# Altium PCB PCB3.PCBDOC
Units mm, origin at the board's own origin, x right, y up, seen from the top; angles counter-clockwise.
Board outline 263.14 x 221.49 mm, 2 copper layers (Top Layer, Bottom Layer); 30 components, 101 nets, 458 pads, 51 vias.
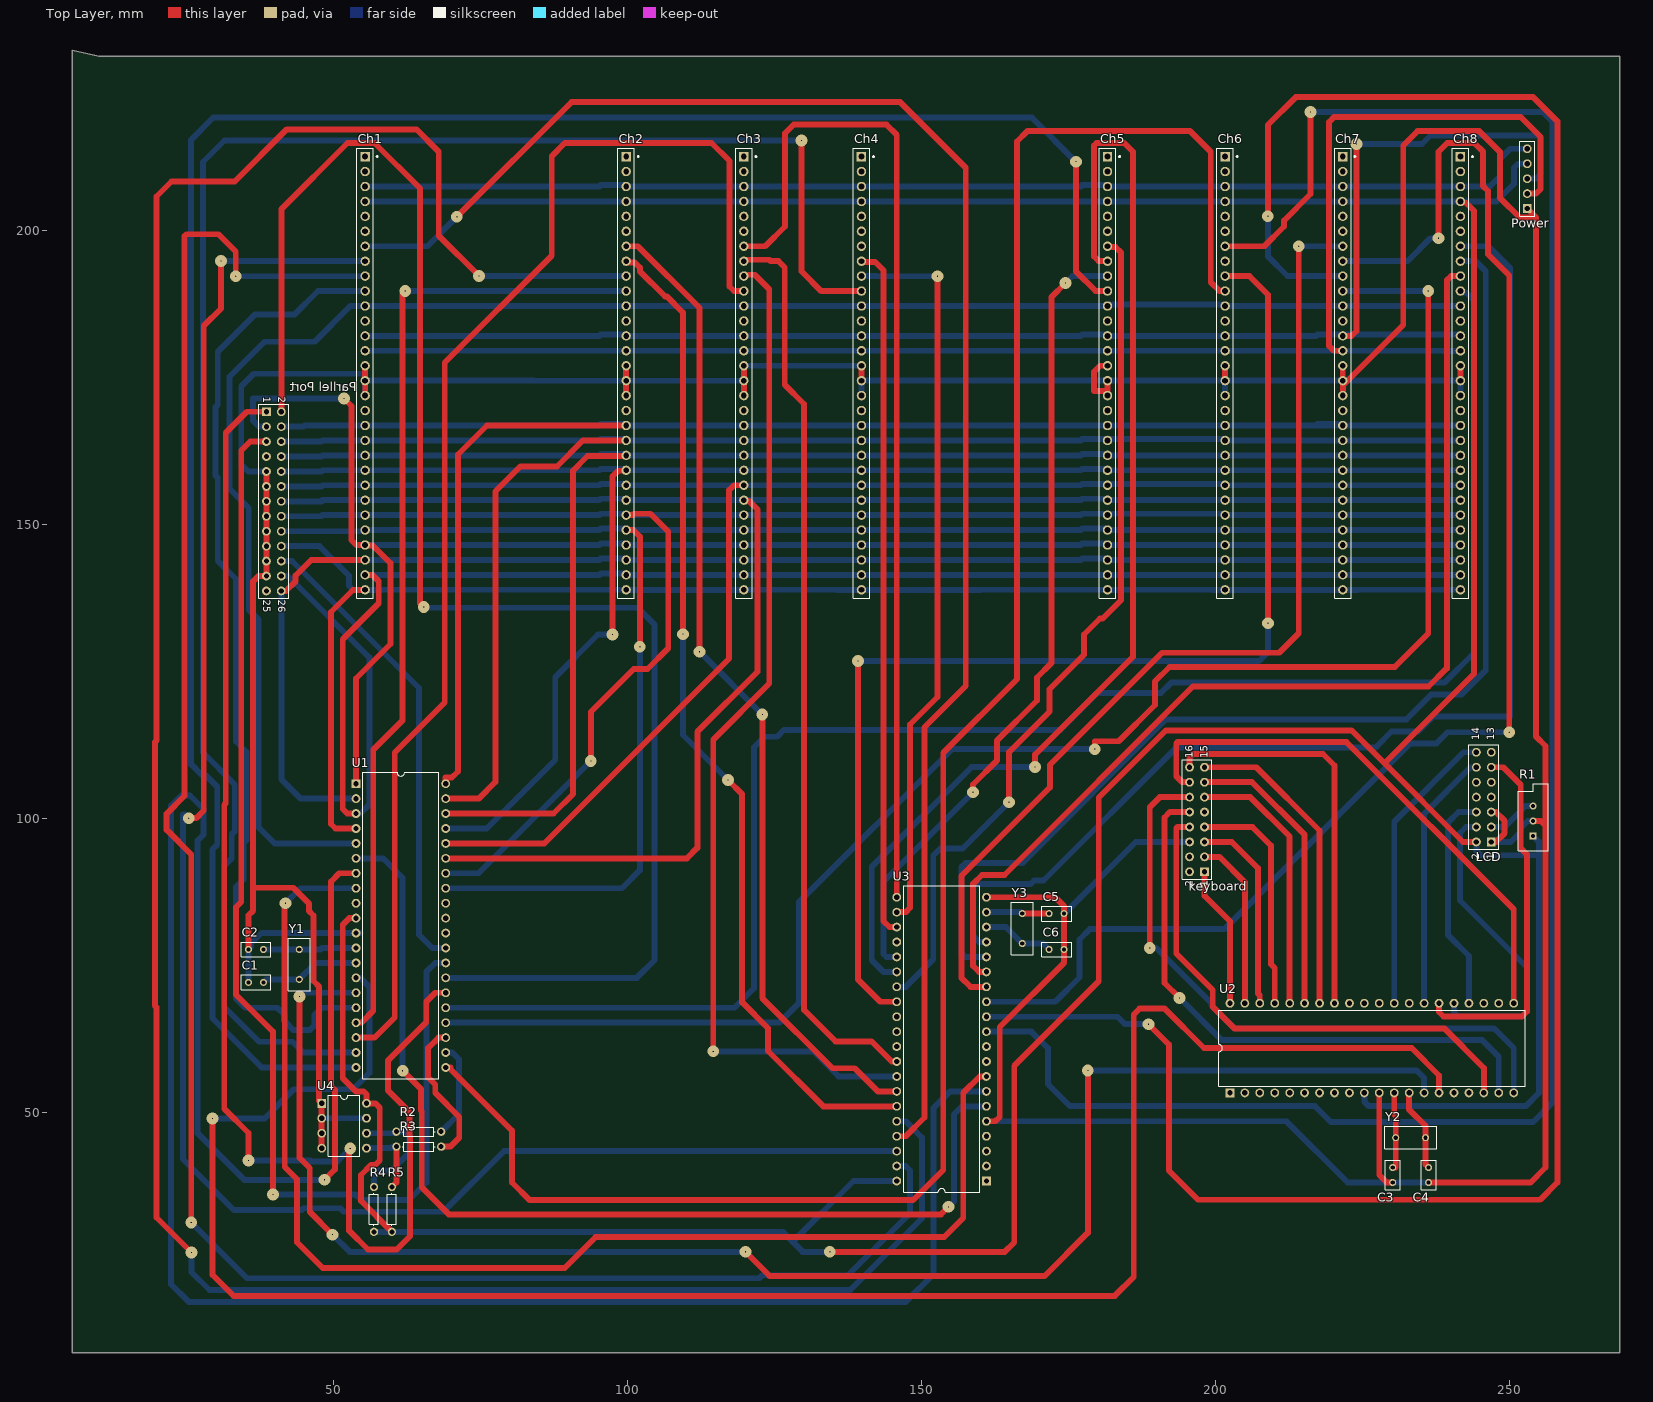
[diagram p0: Top Layer view]
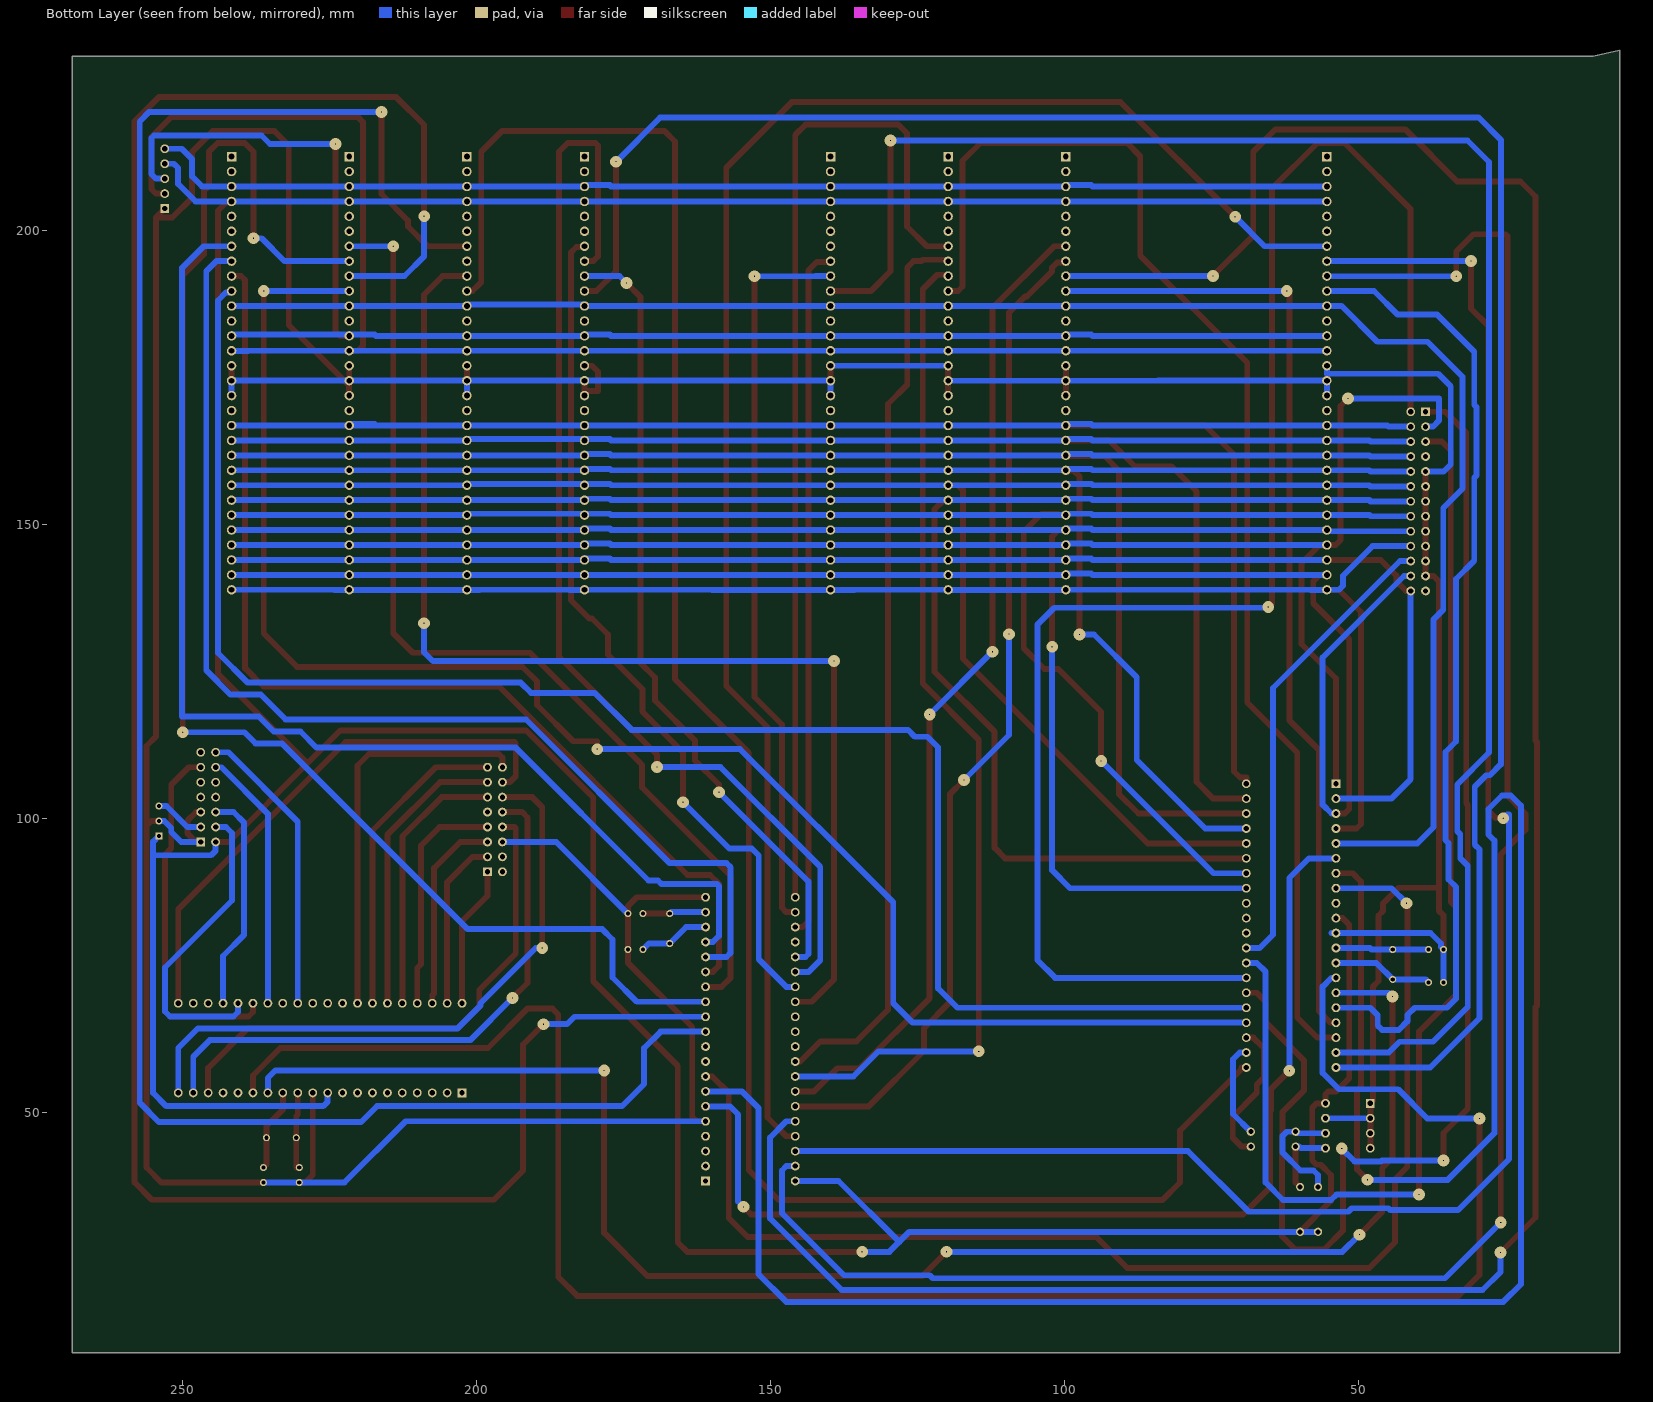
[diagram p1: Bottom Layer view, seen from below]

## Layer stack, top to bottom
Top Layer: signal copper 0.0356
Dielectric: dielectric 0.32, FR-4, Dk 4.8
Bottom Layer: signal copper 0.0356

## Board outline
10.16,229.616 268.732,229.616 268.732,9.144 5.588,9.144 5.588,230.632

## Design rules (kind name [scope] priority, off if disabled: settings)
Clearance [All] p1: gap=1
ComponentClearance [All] p1: gap=0.254 collisioncheckmode=0
PolygonConnect [All] p1: connectstyle=Relief reliefconductorwidth=0.254 reliefentries=4 polygonreliefangle="90 Angle"
RoutingCorners [All] p1: cornerstyle=90-Degree minsetback=2.54 maxsetback=2.54
RoutingLayers [All] p1: top layer=Vertical bottom layer=Horizontal
RoutingVias [All] p1: holewidth=0.2 width=2 viastyle="Through Hole" minholewidth=0.2 minwidth=2 maxholewidth=0.2 maxwidth=2
SolderMaskExpansion [All] p1: expansion=0.102
TestPointUsage [All] p1: valid=0 allowmultiple=FALSE
Testpoint [All] p1: side=15 testpointundercomponent=TRUE minsize=1.016 maxsize=2.54 preferedsize=1.524 minholesize=0 maxholesize=1.016 preferedholesize=0.813 testpointgrid=0.025 style=1023 order=-539222988
Width [All] p1: maxlimit=1 minlimit=1 preferedwidth=1
9 further rules are at their usual default settings.

## Components (designator, comment, footprint, x,y, rotation, side; value= is the part's Value field where it differs from the comment)
C1 "" RAD-0.1 35.56,72.136 r0 top
C2 "" RAD-0.1 35.56,77.724 r0 top
C3 "" RAD-0.1 230.124,38.1 r90 top
C4 "" RAD-0.1 236.22,38.1 r90 top
C5 "" RAD-0.1 174.244,83.82 r180 top
C6 "" RAD-0.1 174.244,77.724 r180 top
Ch1 "" HDR1X30 55.4,212.54 r270 top
Ch2 "" HDR1X30 99.784,212.54 r270 top
Ch3 "" HDR1X30 119.784,212.54 r270 top
Ch4 "" HDR1X30 139.784,212.54 r270 top
Ch5 "" HDR1X30 181.628,212.54 r270 top
Ch6 "" HDR1X30 201.628,212.54 r270 top
Ch7 "" HDR1X30 221.628,212.54 r270 top
Ch8 "" HDR1X30 241.628,212.54 r270 top
keyboard "" HDR2X8 198.12,90.932 r90 top
LCD "" HDR2X7 246.888,96.012 r90 top
"Parllel Port" "" HDR2X13 38.608,169.164 r270 top
Power "" HDR1X5 252.984,203.708 r90 top
R1 "" VR5 254,99.568 r90 top
R2 "" AXIAL-0.3 64.516,46.736 r0 top
R3 "" AXIAL-0.3 64.516,44.196 r0 top
R4 "" AXIAL-0.3 56.896,33.528 r90 top
R5 "" AXIAL-0.3 59.944,33.528 r90 top
U1 "" DIP-40 61.468,81.788 r270 top
U2 "" DIP-40 226.568,60.96 r0 top
U3 "" DIP-40 153.416,62.484 r90 top
U4 "AT24C512" DIP-8 51.816,47.752 r270 top
Y1 "" rad-0.2 44.196,77.724 r270 top
Y2 "" rad-0.2 235.712,45.72 r180 top
Y3 "" rad-0.2 167.132,78.74 r90 top

## Footprints (in the part's own frame and the unit in brackets; to place one, negate y for a bottom-side part, rotate by r counter-clockwise, add the part's x,y. Pads: shape width x height; smd on the part's side, far side on the other; paste and mask are expansions set on the pad)
AXIAL-0.3 [mm]
  round 1.4 hole 0.85: 1(-3.81,0) 2(3.81,0)
  silkscreen extent -2.77,-0.76 2.77,0.76
DIP-8 [mm]
  rect 1.5x1.5 hole 0.9: 1(-3.81,-3.81)
  round 1.5 hole 0.9: 2(-1.27,-3.81) 3(1.27,-3.81) 4(3.81,-3.81) 5(3.81,3.81) 6(1.27,3.81) 7(-1.27,3.81) 8(-3.81,3.81)
  silkscreen extent -5.15,-2.65 5.15,2.65
DIP-40 [mm]
  rect 1.5x1.5 hole 0.9: 1(-24.13,-7.62)
  round 1.5 hole 0.9: 2(-21.59,-7.62) 3(-19.05,-7.62) 4(-16.51,-7.62) 5(-13.97,-7.62) 6(-11.43,-7.62) 7(-8.89,-7.62) 8(-6.35,-7.62) 9(-3.81,-7.62) 10(-1.27,-7.62) 11(1.27,-7.62) 12(3.81,-7.62) 13(6.35,-7.62) 14(8.89,-7.62) 15(11.43,-7.62) 16(13.97,-7.62) 17(16.51,-7.62) 18(19.05,-7.62) 19(21.59,-7.62) 20(24.13,-7.62) 21(24.13,7.62) 22(21.59,7.62) 23(19.05,7.62) 24(16.51,7.62) 25(13.97,7.62) 26(11.43,7.62) 27(8.89,7.62) 28(6.35,7.62) 29(3.81,7.62) 30(1.27,7.62) 31(-1.27,7.62) 32(-3.81,7.62) 33(-6.35,7.62) 34(-8.89,7.62) 35(-11.43,7.62) 36(-13.97,7.62) 37(-16.51,7.62) 38(-19.05,7.62) 39(-21.59,7.62) 40(-24.13,7.62)
  silkscreen extent -26.05,-6.45 26.05,6.45
HDR1X5 [mm]
  rect 1.5x1.5 hole 0.9: 1(0,0)
  round 1.5 hole 0.9: 2(2.54,0) 3(5.08,0) 4(7.62,0) 5(10.16,0)
  silkscreen extent -1.27,-1.27 11.43,1.27
HDR1X30 [mm]
  rect 1.6x1.6 hole 0.99: 1(0,0)
  round 1.6 hole 0.99: 2(2.54,0) 3(5.08,0) 4(7.62,0) 5(10.16,0) 6(12.7,0) 7(15.24,0) 8(17.78,0) 9(20.32,0) 10(22.86,0) 11(25.4,0) 12(27.94,0) 13(30.48,0) 14(33.02,0) 15(35.56,0) 16(38.1,0) 17(40.64,0) 18(43.18,0) 19(45.72,0) 20(48.26,0) 21(50.8,0) 22(53.34,0) 23(55.88,0) 24(58.42,0) 25(60.96,0) 26(63.5,0) 27(66.04,0) 28(68.58,0) 29(71.12,0) 30(73.66,0)
  silkscreen extent -1.4,-1.4 75.06,2.18
HDR2X7 [mm]
  rect 1.5x1.5 hole 0.9: 1(0,0)
  round 1.5 hole 0.9: 2(0,2.54) 3(2.54,0) 4(2.54,2.54) 5(5.08,0) 6(5.08,2.54) 7(7.62,0) 8(7.62,2.54) 9(10.16,0) 10(10.16,2.54) 11(12.7,0) 12(12.7,2.54) 13(15.24,0) 14(15.24,2.54)
  silkscreen extent -1.27,-1.27 16.51,3.81
HDR2X8 [mm]
  rect 1.5x1.5 hole 0.9: 1(0,0)
  round 1.5 hole 0.9: 2(0,2.54) 3(2.54,0) 4(2.54,2.54) 5(5.08,0) 6(5.08,2.54) 7(7.62,0) 8(7.62,2.54) 9(10.16,0) 10(10.16,2.54) 11(12.7,0) 12(12.7,2.54) 13(15.24,0) 14(15.24,2.54) 15(17.78,0) 16(17.78,2.54)
  silkscreen extent -1.27,-1.27 19.05,3.81
HDR2X13 [mm]
  rect 1.5x1.5 hole 0.9: 1(0,0)
  round 1.5 hole 0.9: 2(0,2.54) 3(2.54,0) 4(2.54,2.54) 5(5.08,0) 6(5.08,2.54) 7(7.62,0) 8(7.62,2.54) 9(10.16,0) 10(10.16,2.54) 11(12.7,0) 12(12.7,2.54) 13(15.24,0) 14(15.24,2.54) 15(17.78,0) 16(17.78,2.54) 17(20.32,0) 18(20.32,2.54) 19(22.86,0) 20(22.86,2.54) 21(25.4,0) 22(25.4,2.54) 23(27.94,0) 24(27.94,2.54) 25(30.48,0) 26(30.48,2.54)
  silkscreen extent -1.27,-1.27 31.75,3.81
RAD-0.1 [mm]
  round 1.2 hole 0.7: 1(0,0) 2(2.54,0)
  silkscreen extent -1.27,-1.27 3.81,1.27
rad-0.2 [mm]
  round 1.2 hole 0.7: 1(0,0) 2(5.08,0)
  silkscreen extent -1.91,-1.91 6.98,1.91
VR5 [mm]
  rect 1.2x1.2 hole 0.7: 1(-2.54,0)
  round 1.2 hole 0.7: 2(0,0) 3(2.54,0)
  silkscreen extent -5.08,-2.54 6.35,2.54

## Part data
C1 C2 C3 C4 C5 C6: library part Cap, "Capacitor"
Ch1 Ch2 Ch3 Ch4 Ch5 Ch6 Ch7 Ch8: library part "Header 30", "Header, 30-Pin"
keyboard: library part "Header 8X2", "Header, 8-Pin, Dual row"
LCD: library part "Header 7X2", "Header, 7-Pin, Dual row"
"Parllel Port": library part "Header 13X2", "Header, 13-Pin, Dual row"
Power: library part "Header 5", "Header, 5-Pin"
R1: library part RPot1, "Potentiometer"
R2 R3 R4 R5: library part Res1, "Resistor"
U1 U2: library part ATMEGA32_DIP40, "Atmel Microcontroller - Library created by carel..  <www.mpfreezone.com>"
U3: library part ATMEGA8515_DIP40, "Atmel Microcontroller - Library created by carel..  <www.mpfreezone.com>"
U4: "Serial EEPROM 512KBit Memory"
Y1 Y2 Y3: library part XTAL, "Crystal Oscillator"

## Via types
v1: diameter 2, hole 0.2, Top Layer to Bottom Layer, 51 vias

## Nets (pads, with @x,y where several pads share a name; then routed paths per layer and width w, separated by ;. In a path a pad name is that pad's centre, name@x,y a point inside that pad or via, vN(x,y) a via of type N, cw(c..) or ccw(c..) an arc to the next point about the centre after c; other vN are vias at no path point)
NetC1_1: C1.2 U1.13 Y1.2 | length 17.1
  Bottom Layer w1: C1.2 38.608,72.644 Y1.2 46.99,75.438 U1.13
NetC1_2: "Parllel Port.9" "Parllel Port.11" "Parllel Port.13" "Parllel Port.15" "Parllel Port.17" "Parllel Port.19" "Parllel Port.21" "Parllel Port.23" C1.1 C2.1 C3.1 C4.1 C5.1 C6.1 Ch1.15 Ch1.16 Ch1.17 Ch2.15 Ch2.16 Ch2.17 Ch3.15 Ch3.16 Ch3.17 Ch4.15 Ch4.16 Ch4.17 Ch5.15 Ch5.16 Ch5.17 Ch6.15 Ch6.16 Ch6.17 Ch7.15 Ch7.16 Ch7.17 Ch8.15 Ch8.16 Ch8.17 keyboard.6 LCD.1 LCD.5 Power.1 R1.2 U1.11 U2.11 U3.5 U3.20 U4.1 U4.2 U4.3 U4.4 U4.7 | length 921
  Top Layer w1: C2.1 35.56,83.541 36.347,84.328 36.347,88.214 ; 38.608,159.004 38.608,156.464 38.608,153.924 38.608,151.384 38.608,148.844 38.608,146.304 38.608,143.764 38.608,141.224 37.236,141.224 36.347,140.335 36.347,88.214 ; U4.4 U4.3 U4.2 U4.1 47.574,51.994 47.574,71.399 46.609,72.365 46.609,83.515 45.822,84.303 45.822,85.573 43.18,88.214 36.347,88.214 ; Ch1.17 55.423,171.9 55.423,174.44 55.423,174.498 55.4,174.498 Ch1.15 ; Ch2.17 99.771,171.9 99.771,172.161 99.784,172.161 Ch2.16 99.771,174.453 99.771,176.98 99.771,176.987 99.784,176.987 Ch2.15 ; Ch3.17 119.784,171.907 119.786,171.907 119.786,174.44 119.786,175.717 ; Ch3.16 119.784,175.717 119.786,175.717 ; Ch3.15 119.786,176.98 119.786,175.717 ; Ch4.16 139.776,174.44 139.776,176.98 Ch4.15 ; U3.5 162.56,48.514 163.297,49.251 163.297,64.541 174.244,75.489 C6.1 C5.1 174.244,85.09 172.72,86.614 U3.20 ; Ch5.17 181.61,171.9 181.61,172.713 ; Ch5.16 181.628,174.447 181.61,174.447 181.61,174.44 181.61,172.713 ; Ch5.15 180.34,176.98 179.324,175.964 179.324,172.713 181.61,172.713 ; Ch6.16 201.628,175.717 201.625,175.717 201.625,176.98 Ch6.15 ; Ch7.17 221.64,171.9 221.64,173.634 Ch7.16@222.037,174.031 ; Ch7.15 221.628,175.717 221.615,175.717 221.615,174.44 Ch7.16 Ch7.16@222.037,174.031 ; U2.11 227.838,39.37 229.108,38.1 C3.1 ; C4.1 253.568,38.1 256.108,40.64 256.108,98.73 ; Ch8.16 241.628,175.717 241.63,175.717 241.63,176.98 Ch8.15 ; LCD.1 247.65,96.012 249.149,97.511 249.149,99.593 247.65,101.092 LCD.5 ; Power.1 254.508,202.184 ; R1.2 255.27,99.568 256.108,98.73 ; Ch7.16@222.037,174.031 231.902,183.896 231.902,214.427 234.34,216.865 244.831,216.865 248.336,213.36 248.336,205.562 251.714,202.184 254.508,202.184 ; 254.508,202.184 254.508,113.919 256.108,112.319 256.108,98.73
  Bottom Layer w1: C1.1 C2.1 35.992,78.156 35.992,78.74 37.77,80.518 U1.11 54.61,80.518 ; 38.608,159.004 35.535,159.004 34.341,160.198 34.341,173.482 36.474,175.616 55.4,175.616 Ch1.15 ; U4.2 U4.7 ; Ch1.17 Ch1.16 58.166,174.44 58.166,174.447 84.074,174.447 84.099,174.422 99.784,174.422 Ch2.16@99.797,174.422 ; Ch2.16 99.797,174.44 Ch2.16@99.797,174.422 ; Ch3.16 119.784,174.422 Ch2.16@99.797,174.422 ; Ch3.15 119.784,176.987 139.784,176.987 Ch4.15 ; Ch4.17 139.776,171.9 139.776,173.177 139.784,173.177 Ch4.16 142.392,174.44 142.392,174.447 181.621,174.447 Ch5.16 184.125,174.44 184.125,174.447 Ch6.16@201.621,174.447 ; U3.5 212.039,48.514 222.453,38.1 C3.1 C4.1 ; C5.1 186.436,96.012 keyboard.6 ; Ch6.17 Ch6.16 ; Ch8.17 241.605,171.9 241.605,172.11 241.628,172.11 Ch8.16@241.628,174.422 ; LCD.1 250.19,96.012 251.892,97.714 251.892,98.374 253.086,99.568 R1.2 ; Ch6.16@201.621,174.447 Ch6.16 ; Ch6.16@201.621,174.447 Ch6.16@201.628,174.447 ; Ch6.16 Ch6.16@201.628,174.447 ; Ch6.16@201.628,174.447 Ch7.16@221.621,174.447 ; Ch7.16@221.621,174.447 Ch7.16 224.13,174.44 224.13,174.447 ; Ch7.16@221.621,174.447 221.628,174.447 224.13,174.447 ; 224.13,174.447 234.594,174.447 ; 234.594,174.447 241.628,174.447 Ch8.16 Ch8.16@241.628,174.422 ; 234.594,174.447 234.62,174.422 Ch8.16@241.628,174.422
NetC2_2: C2.2 U1.12 Y1.1 | length 15.9
  Bottom Layer w1: C2.2 Y1.1 47.828,77.724 48.082,77.978 U1.12
NetC3_2: C3.2 U2.12 Y2.2 | length 13.3
  Top Layer w1: C3.2 230.632,40.64 Y2.2 230.632,49.403 230.378,49.657 U2.12
NetC4_2: C4.2 U2.13 Y2.1 | length 14.1
  Top Layer w1: U2.13 232.918,50.495 235.712,47.701 Y2.1 235.712,41.148 C4.2
NetC5_2: C5.2 U3.19 Y3.2 | length 10.8
  Top Layer w1: Y3.2 C5.2
  Bottom Layer w1: U3.19 166.878,84.074 Y3.2
NetC6_2: C6.2 U3.18 Y3.1 | length 12.2
  Bottom Layer w1: U3.18 164.338,81.534 Y3.1 170.688,78.74 C6.2
NetCh1_3: Ch1.3 Ch2.3 Ch3.3 Ch4.3 Ch5.3 Ch6.3 Ch7.3 Ch8.3 Power.5 | length 202.7
  Bottom Layer w1: Ch1.3 58.166,207.46 58.166,207.467 95.225,207.467 95.453,207.696 99.784,207.696 99.797,207.696 Ch2.3@99.797,207.467 ; Ch2.3 99.797,207.46 Ch2.3@99.797,207.467 ; Ch3.3 Ch3.3@119.784,207.467 ; Ch5.3 181.635,207.46 Ch5.3@181.635,207.467 ; Ch7.3 221.64,207.46 Ch7.3@221.64,207.467 ; Ch8.3 Ch8.3@241.628,207.467 ; Power.5 250.114,213.868 248.336,212.09 248.336,209.169 246.634,207.467 Ch8.3@241.628,207.467 ; Ch2.3@99.797,207.467 Ch3.3@119.784,207.467 ; Ch3.3@119.784,207.467 129.794,207.467 129.794,207.46 Ch4.3 142.392,207.46 142.392,207.467 177.089,207.467 177.317,207.696 181.628,207.696 181.635,207.696 Ch5.3@181.635,207.467 ; Ch5.3@181.635,207.467 201.621,207.467 Ch6.3 204.14,207.46 204.14,207.467 221.628,207.467 Ch7.3@221.64,207.467 ; Ch7.3@221.64,207.467 Ch8.3@241.628,207.467
NetCh1_4: Ch1.4 Ch2.4 Ch3.4 Ch4.4 Ch5.4 Ch6.4 Ch7.4 Ch8.4 LCD.2 Power.4 R1.1 R4.1 R5.1 U1.10 U2.10 U3.40 U4.8 | length 765.4
  Top Layer w1: U1.10 52.705,83.058 51.587,81.94 51.587,55.829 53.823,53.594 55.118,53.594 55.626,53.086 U4.8 57.15,51.562 57.887,50.825 57.887,41.859 57.15,41.123 56.439,41.123 54.686,39.37 54.686,34.976 R5.1 ; v1(134.417,26.314) 164.16,26.314 165.76,27.915 165.76,57.937 180.137,72.314 180.137,103.556 191.567,114.986 223.114,114.986 228.714,109.385 ; Ch8.4 241.628,204.699 242.57,204.699 243.942,203.327 243.942,124.612 228.714,109.385 ; LCD.2 242.087,96.012 228.714,109.385
  Bottom Layer w1: Ch1.4 58.166,204.92 58.166,204.927 99.784,204.927 102.286,204.927 ; R4.1 R5.1 126.39,29.718 128.092,28.016 ; Ch2.4 102.286,204.92 102.286,204.927 ; Ch3.4 119.784,204.902 115.595,204.902 115.57,204.927 ; v1(134.417,26.314) 129.794,26.314 128.092,28.016 ; U3.40 138.43,38.354 128.092,28.016 ; Ch5.4 184.125,204.92 184.125,204.927 ; Ch6.4 204.14,204.92 204.14,204.927 206.578,204.927 ; Ch7.4 224.13,204.92 224.13,204.927 ; U2.10 225.298,51.841 226.06,51.079 252.73,51.079 254.965,53.315 254.965,93.751 ; Ch8.4 Ch8.4@241.628,204.927 ; LCD.2 244.348,94.513 245.11,93.751 254.965,93.751 ; Power.4 251.46,211.328 250.723,210.591 250.723,207.874 247.777,204.927 Ch8.4@241.628,204.927 ; R1.1 254.965,96.063 254.965,93.751 ; 102.286,204.927 115.57,204.927 ; 115.57,204.927 119.784,204.927 132.817,204.927 132.817,204.92 Ch4.4 142.392,204.92 142.392,204.927 181.628,204.927 184.125,204.927 ; 184.125,204.927 190.221,204.927 190.246,204.902 201.628,204.902 206.553,204.902 206.578,204.927 ; 206.578,204.927 221.628,204.927 224.13,204.927 ; 224.13,204.927 Ch8.4@241.628,204.927
NetCh1_7: Ch1.7 U3.37 | length 287.3
  Top Layer w1: v1(70.993,202.311) 90.475,221.793 146.38,221.793 157.531,210.642 157.531,122.53 150.495,115.494 150.495,49.149 147.32,45.974 U3.37
  Bottom Layer w1: Ch1.7 56.617,197.3 56.617,197.307 65.989,197.307 v1(70.993,202.311)
NetCh1_8: Ch1.8 U3.38 | length 311.7
  Top Layer w1: v1(25.4,100.051) 26.67,100.051 27.965,101.346 27.965,183.769 30.886,186.69 v1(30.886,194.767)
  Bottom Layer w1: v1(25.4,100.051) 24.79,100.66 24.409,100.66 24.409,100.051 24.409,42.088 33.096,33.401 44.602,33.401 44.933,33.731 51.156,33.731 51.765,33.122 68.682,33.122 78.994,43.434 U3.38 ; v1(30.886,194.767) 55.4,194.767 Ch1.8
NetCh1_9: Ch1.9 U3.39 | length 347.6
  Top Layer w1: v1(25.832,31.293) 25.832,93.878 21.641,98.069 21.641,100.813 24.689,103.861 24.689,199.009 25.019,199.339 30.48,199.339 33.401,196.418 v1(33.401,192.202)
  Bottom Layer w1: v1(25.832,31.293) 35.306,21.819 122.428,21.819 122.936,22.327 137.516,22.327 148.057,32.868 148.057,40.157 147.32,40.894 U3.39 ; v1(33.401,192.202) 55.4,192.202 Ch1.9
NetCh1_10: Ch1.10 U1.16 | length 168.3
  Bottom Layer w1: U1.16 48.006,67.818 46.736,66.548 46.736,64.77 45.999,64.033 43.18,64.033 41.707,65.507 41.707,66.573 40.462,67.818 34.976,67.818 33.452,69.342 33.452,88.367 34.722,89.637 34.722,95.809 35.23,96.317 35.23,111.303 33.452,113.081 33.452,140.716 30.328,143.84 30.328,157.937 29.972,158.293 29.972,169.977 30.328,170.332 30.328,179.349 36.652,185.674 43.358,185.674 47.371,189.687 55.4,189.687 55.423,189.687 55.423,189.68 Ch1.10
NetCh1_10: 
NetCh1_11: Ch1.11 Ch2.11 Ch3.11 Ch4.11 Ch5.11 Ch6.11 Ch7.11 Ch8.11 U1.5 | length 330.7
  Bottom Layer w1: U1.5 40.03,95.758 37.236,98.552 37.236,133.858 35.611,135.484 35.611,152.806 32.334,156.083 32.334,175.108 38.278,181.051 46.812,181.051 52.883,187.122 ; Ch1.11 Ch1.11@55.393,187.147 ; Ch2.11 99.797,187.14 99.79,187.146 Ch2.11@99.789,187.147 ; Ch3.11 Ch3.11@119.784,187.147 ; Ch5.11 181.635,187.14 181.632,187.144 181.628,187.147 Ch5.11@181.407,187.147 ; Ch7.11 221.64,187.14 221.634,187.146 Ch7.11@221.633,187.147 ; Ch8.11 241.628,187.147 Ch7.11@221.633,187.147 ; 52.883,187.122 52.908,187.147 Ch1.11@55.393,187.147 ; 52.883,187.122 55.4,187.122 68.504,187.122 68.529,187.147 ; Ch1.11@55.393,187.147 55.4,187.147 68.529,187.147 ; 68.529,187.147 99.784,187.147 Ch2.11@99.789,187.147 ; Ch2.11@99.789,187.147 Ch3.11@119.784,187.147 ; Ch3.11@119.784,187.147 Ch4.11@139.784,187.147 ; Ch4.11@139.784,187.147 142.392,187.147 ; Ch4.11@139.784,187.147 Ch4.11 142.392,187.14 142.392,187.147 ; 142.392,187.147 Ch5.11@181.407,187.147 ; Ch5.11@181.407,187.147 181.514,187.254 181.635,187.376 201.392,187.376 Ch6.11 202.895,187.14 ; 202.895,187.14 202.895,187.147 204.14,187.147 ; 202.895,187.14 204.14,187.14 204.14,187.147 ; 204.14,187.147 221.628,187.147 Ch7.11@221.633,187.147
NetCh1_11: 
NetCh1_13: Ch1.13 Ch2.13 Ch3.13 Ch4.13 Ch5.13 Ch6.13 Ch7.13 Ch8.13 Power.3 | length 262.8
  Top Layer w1: Ch7.13 221.628,182.042 223.114,182.042 223.952,182.88 v1(223.952,214.681)
  Bottom Layer w1: Ch1.13 56.515,182.06 56.515,182.067 95.225,182.067 95.453,182.296 99.784,182.296 99.797,182.296 Ch2.13@99.797,182.067 ; Ch2.13 99.797,182.06 Ch2.13@99.797,182.067 ; Ch3.13 Ch3.13@119.784,182.067 ; Ch5.13 181.635,182.06 Ch5.13@181.635,182.067 ; Ch7.13 221.64,182.06 Ch7.13@221.64,182.296 ; v1(223.952,214.681) 235.102,214.681 236.55,216.129 254.813,216.129 255.245,215.697 255.245,209.55 254.483,208.788 Power.3 ; Ch8.13 241.63,182.06 241.63,182.296 241.628,182.296 Ch7.13@221.64,182.296 ; Ch2.13@99.797,182.067 Ch3.13@119.784,182.067 ; Ch3.13@119.784,182.067 129.794,182.067 129.794,182.06 Ch4.13 142.392,182.06 142.392,182.067 177.089,182.067 177.317,182.296 181.628,182.296 181.635,182.296 Ch5.13@181.635,182.067 ; Ch5.13@181.635,182.067 201.621,182.067 Ch6.13 204.14,182.06 204.14,182.067 217.068,182.067 217.297,182.296 221.628,182.296 Ch7.13@221.64,182.296
NetCh1_14: Ch1.14 Ch2.14 Ch3.14 Ch4.14 Ch5.14 Ch6.14 Ch7.14 Ch8.14 Power.2 | length 276.3
  Top Layer w1: Ch7.14 221.628,179.527 220.116,179.527 219.304,180.34 219.304,218.44 220.167,219.304 251.841,219.304 255.245,215.9 255.245,207.01 254.483,206.248 Power.2
  Bottom Layer w1: Ch1.14 58.166,179.52 58.166,179.527 99.784,179.527 Ch2.14@99.797,179.527 ; Ch2.14 99.797,179.52 Ch2.14@99.797,179.527 ; Ch3.14 Ch3.14@119.784,179.527 ; Ch5.14 181.635,179.52 Ch5.14@181.635,179.527 ; Ch6.14 Ch6.14@201.628,179.527 ; Ch7.14 221.615,179.52 Ch7.14@221.615,179.527 ; Ch8.14 241.628,179.502 238.811,179.502 238.785,179.527 221.628,179.527 Ch7.14@221.615,179.527 ; Ch2.14@99.797,179.527 Ch3.14@119.784,179.527 ; Ch3.14@119.784,179.527 139.784,179.527 Ch4.14 142.392,179.52 142.392,179.527 181.628,179.527 Ch5.14@181.635,179.527 ; Ch5.14@181.635,179.527 Ch6.14@201.628,179.527 ; Ch6.14@201.628,179.527 Ch7.14@221.615,179.527
NetCh1_19: "Parllel Port.4" Ch1.19 Ch2.19 Ch3.19 Ch4.19 Ch5.19 Ch6.19 Ch7.19 Ch8.19 U1.40 | length 294
  Top Layer w1: U1.40 69.088,106.959 70.129,106.959 71.171,108.001 71.171,161.874 76.124,166.827 99.784,166.827 Ch2.19
  Bottom Layer w1: 41.148,166.624 44.933,166.624 45.136,166.827 55.393,166.827 Ch1.19 58.166,166.82 58.166,166.827 95.225,166.827 95.453,167.056 99.784,167.056 99.797,167.056 Ch2.19@99.797,166.827 ; Ch2.19 99.797,166.82 Ch2.19@99.797,166.827 ; Ch3.19 Ch3.19@119.784,166.827 ; Ch4.19 Ch4.19@139.784,166.827 ; Ch5.19 181.635,166.82 Ch5.19@181.635,166.827 ; Ch7.19 221.64,166.82 Ch7.19@221.64,166.827 ; Ch8.19 241.63,166.82 241.63,166.827 241.628,166.827 Ch7.19@221.64,166.827 ; Ch2.19@99.797,166.827 Ch3.19@119.784,166.827 ; Ch3.19@119.784,166.827 Ch4.19@139.784,166.827 ; Ch4.19@139.784,166.827 181.628,166.827 Ch5.19@181.635,166.827 ; Ch5.19@181.635,166.827 201.621,166.827 Ch6.19 204.14,166.82 204.14,166.827 217.068,166.827 ; 217.068,166.827 217.297,167.056 221.628,167.056 221.64,167.056 Ch7.19@221.64,166.827 ; 217.068,166.827 221.628,166.827 Ch7.19@221.64,166.827
NetCh1_20: "Parllel Port.6" Ch1.20 Ch2.20 Ch3.20 Ch4.20 Ch5.20 Ch6.20 Ch7.20 Ch8.20 U1.39 | length 286.6
  Top Layer w1: U1.39 74.727,103.378 77.572,106.223 77.572,155.626 81.788,159.842 88.011,159.842 92.456,164.287 99.784,164.287 99.797,164.287 99.797,164.28 Ch2.20
  Bottom Layer w1: 41.148,164.084 47.955,164.084 48.158,164.287 55.393,164.287 Ch1.20 58.166,164.28 58.166,164.287 95.225,164.287 95.453,164.516 99.784,164.516 99.797,164.516 Ch2.20@99.797,164.287 ; Ch2.20 99.797,164.28 Ch2.20@99.797,164.287 ; Ch3.20 Ch3.20@119.784,164.287 ; Ch5.20 181.635,164.28 Ch5.20@181.635,164.516 ; Ch6.20 201.651,164.28 Ch6.20@201.651,164.516 ; Ch7.20 Ch7.20@221.633,164.28 ; Ch8.20 241.628,164.287 224.13,164.287 224.13,164.28 Ch7.20@221.633,164.28 ; Ch2.20@99.797,164.287 Ch3.20@119.784,164.287 ; Ch3.20@119.784,164.287 139.784,164.287 Ch4.20 142.392,164.28 142.392,164.287 177.089,164.287 177.317,164.516 181.628,164.516 Ch5.20@181.635,164.516 ; Ch5.20@181.635,164.516 201.628,164.516 Ch6.20@201.651,164.516 ; Ch6.20@201.651,164.516 201.757,164.409 201.879,164.287 221.626,164.287 221.631,164.283 Ch7.20@221.633,164.28
NetCh1_21: "Parllel Port.8" Ch1.21 Ch2.21 Ch3.21 Ch4.21 Ch5.21 Ch6.21 Ch7.21 Ch8.21 U1.38 | length 289.5
  Top Layer w1: U1.38 87.427,100.838 90.729,104.14 90.729,159.131 93.218,161.62 99.784,161.62 Ch2.21
  Bottom Layer w1: 41.148,161.544 47.955,161.544 48.158,161.747 55.393,161.747 Ch1.21 58.166,161.74 58.166,161.747 95.225,161.747 95.453,161.976 99.784,161.976 99.797,161.976 Ch2.21@99.797,161.747 ; Ch2.21 99.797,161.74 Ch2.21@99.797,161.747 ; Ch3.21 Ch3.21@119.784,161.747 ; Ch5.21 181.635,161.74 Ch5.21@181.635,161.747 ; Ch6.21 Ch6.21@201.621,161.747 ; Ch7.21 221.615,161.74 Ch7.21@221.615,161.747 ; Ch8.21 241.63,161.74 241.63,161.747 241.628,161.747 221.628,161.747 Ch7.21@221.615,161.747 ; Ch2.21@99.797,161.747 Ch3.21@119.784,161.747 ; Ch3.21@119.784,161.747 139.784,161.747 Ch4.21 142.392,161.74 142.392,161.747 177.089,161.747 177.317,161.976 181.628,161.976 181.635,161.976 Ch5.21@181.635,161.747 ; Ch5.21@181.635,161.747 Ch6.21@201.621,161.747 ; Ch6.21@201.621,161.747 201.628,161.747 Ch7.21@221.615,161.747
NetCh1_22: "Parllel Port.10" Ch1.22 Ch2.22 Ch3.22 Ch4.22 Ch5.22 Ch6.22 Ch7.22 Ch8.22 U1.37 | length 281.3
  Top Layer w1: v1(97.46,131.267) 97.46,158.166 98.425,159.131 99.212,159.131 99.212,159.2 Ch2.22
  Bottom Layer w1: 41.148,159.004 47.955,159.004 48.158,159.207 55.393,159.207 Ch1.22 58.166,159.2 58.166,159.207 95.225,159.207 95.453,159.436 99.784,159.436 99.797,159.436 Ch2.22@99.797,159.207 ; U1.37 76.073,98.298 87.732,109.957 87.732,124.003 94.996,131.267 v1(97.46,131.267) ; Ch2.22 99.797,159.2 Ch2.22@99.797,159.207 ; Ch3.22 Ch3.22@119.784,159.207 ; Ch5.22 181.635,159.2 Ch5.22@181.635,159.207 ; Ch8.22 241.63,159.2 241.63,159.207 241.628,159.207 224.13,159.207 224.13,159.2 Ch7.22 221.621,159.207 204.14,159.207 204.14,159.2 Ch6.22 201.621,159.207 Ch5.22@181.635,159.207 ; Ch2.22@99.797,159.207 Ch3.22@119.784,159.207 ; Ch3.22@119.784,159.207 139.784,159.207 Ch4.22 142.392,159.2 142.392,159.207 177.089,159.207 177.317,159.436 181.628,159.436 181.635,159.436 Ch5.22@181.635,159.207
NetCh1_23: "Parllel Port.12" Ch1.23 Ch2.23 Ch3.23 Ch4.23 Ch5.23 Ch6.23 Ch7.23 Ch8.23 U1.36 | length 294.3
  Top Layer w1: U1.36 85.852,95.758 117.297,127.203 117.297,155.854 118.11,156.667 119.784,156.667 Ch3.23
  Bottom Layer w1: 41.148,156.464 47.955,156.464 48.158,156.667 55.393,156.667 Ch1.23 58.166,156.66 58.166,156.667 95.225,156.667 95.453,156.896 99.784,156.896 99.797,156.896 Ch2.23@99.797,156.667 ; Ch2.23 99.797,156.66 Ch2.23@99.797,156.667 ; Ch3.23 Ch3.23@119.784,156.667 ; Ch5.23 181.635,156.66 Ch5.23@181.635,156.896 ; Ch6.23 201.651,156.66 Ch6.23@201.651,156.667 ; Ch7.23 Ch7.23@221.621,156.667 ; Ch8.23 241.628,156.667 221.628,156.667 Ch7.23@221.621,156.667 ; Ch2.23@99.797,156.667 Ch3.23@119.784,156.667 ; Ch3.23@119.784,156.667 139.784,156.667 Ch4.23 142.392,156.66 142.392,156.667 177.089,156.667 177.317,156.896 181.628,156.896 Ch5.23@181.635,156.896 ; Ch5.23@181.635,156.896 201.628,156.896 201.651,156.896 Ch6.23@201.651,156.667 ; Ch6.23@201.651,156.667 Ch7.23@221.621,156.667
NetCh1_24: "Parllel Port.14" Ch1.24 Ch2.24 Ch3.24 Ch4.24 Ch5.24 Ch6.24 Ch7.24 Ch8.24 U1.35 | length 309.7
  Top Layer w1: U1.35 110.109,93.218 111.887,94.996 111.887,114.732 122.098,124.943 122.098,152.552 120.65,154 119.784,154 Ch3.24
  Bottom Layer w1: 41.148,153.924 47.955,153.924 48.158,154.127 55.393,154.127 Ch1.24 58.166,154.12 58.166,154.127 95.225,154.127 95.453,154.356 99.784,154.356 99.797,154.356 Ch2.24@99.797,154.127 ; Ch2.24 99.797,154.12 Ch2.24@99.797,154.127 ; Ch3.24 Ch3.24@119.784,154.127 ; Ch5.24 181.635,154.12 Ch5.24@181.635,154.127 ; Ch8.24 241.63,154.12 241.63,154.127 241.628,154.127 224.13,154.127 224.13,154.12 Ch7.24 221.621,154.127 204.14,154.127 204.14,154.12 Ch6.24 201.621,154.127 Ch5.24@181.635,154.127 ; Ch2.24@99.797,154.127 Ch3.24@119.784,154.127 ; Ch3.24@119.784,154.127 139.784,154.127 Ch4.24 142.392,154.12 142.392,154.127 177.089,154.127 177.317,154.356 181.628,154.356 181.635,154.356 Ch5.24@181.635,154.127
NetCh1_25: "Parllel Port.16" Ch1.25 Ch2.25 Ch3.25 Ch4.25 Ch5.25 Ch6.25 Ch7.25 Ch8.25 U1.34 | length 288.5
  Top Layer w1: v1(93.777,109.779) 93.777,118.11 101.067,125.4 103.403,125.4 106.934,128.93 106.934,148.793 103.911,151.816 101.092,151.816 100.863,151.587 100.863,151.58 Ch2.25
  Bottom Layer w1: 41.148,151.384 47.955,151.384 48.158,151.587 55.393,151.587 Ch1.25 58.166,151.58 58.166,151.587 95.225,151.587 95.453,151.816 99.784,151.816 99.797,151.816 Ch2.25@99.797,151.587 ; U1.34 74.676,90.678 v1(93.777,109.779) ; Ch2.25 99.797,151.58 Ch2.25@99.797,151.587 ; Ch3.25 Ch3.25@119.784,151.587 ; Ch5.25 181.635,151.58 Ch5.25@181.635,151.816 ; Ch6.25 201.651,151.58 Ch6.25@201.651,151.587 ; Ch7.25 Ch7.25@221.621,151.587 ; Ch8.25 241.63,151.58 241.63,151.587 241.628,151.587 221.628,151.587 Ch7.25@221.621,151.587 ; Ch2.25@99.797,151.587 Ch3.25@119.784,151.587 ; Ch3.25@119.784,151.587 139.784,151.587 Ch4.25 142.392,151.58 142.392,151.587 177.089,151.587 177.317,151.816 181.628,151.816 Ch5.25@181.635,151.816 ; Ch5.25@181.635,151.816 201.628,151.816 201.651,151.816 Ch6.25@201.651,151.587 ; Ch6.25@201.651,151.587 Ch7.25@221.621,151.587
NetCh1_26: "Parllel Port.18" Ch1.26 Ch2.26 Ch3.26 Ch4.26 Ch5.26 Ch6.26 Ch7.26 Ch8.26 U1.33 | length 295.3
  Top Layer w1: Ch2.26 99.797,149.04 99.797,149.047 101.016,149.047 102.108,147.955 v1(102.108,129.184)
  Bottom Layer w1: 41.148,148.844 55.397,148.844 55.397,149.04 Ch1.26 58.166,149.04 58.166,149.047 95.225,149.047 95.453,149.276 99.784,149.276 99.797,149.276 Ch2.26@99.797,149.047 ; U1.33 99.06,88.138 102.108,91.186 v1(102.108,129.184) ; Ch2.26 99.797,149.04 Ch2.26@99.797,149.047 ; Ch3.26 Ch3.26@119.784,149.047 ; Ch5.26 181.635,149.04 Ch5.26@181.635,149.047 ; Ch8.26 241.63,149.04 241.63,149.047 241.628,149.047 224.13,149.047 224.13,149.04 Ch7.26 221.621,149.047 204.14,149.047 204.14,149.04 Ch6.26 201.621,149.047 Ch5.26@181.635,149.047 ; Ch2.26@99.797,149.047 Ch3.26@119.784,149.047 ; Ch3.26@119.784,149.047 139.784,149.047 Ch4.26 142.392,149.04 142.392,149.047 177.089,149.047 177.317,149.276 181.628,149.276 181.635,149.276 Ch5.26@181.635,149.047
NetCh1_27: "Parllel Port.3" Ch1.27 Ch2.27 Ch3.27 Ch4.27 Ch5.27 Ch6.27 Ch7.27 Ch8.27 U1.1 | length 281.7
  Top Layer w1: v1(51.791,171.425) 53.086,170.129 53.086,147.32 53.899,146.507 55.4,146.507 Ch1.27 55.4,146.431 56.693,146.431 59.715,143.408 59.715,129.667 53.848,123.8 U1.1
  Bottom Layer w1: 38.608,166.624 37.363,166.624 36.347,167.64 36.347,171.425 v1(51.791,171.425) ; Ch1.27 58.166,146.5 58.166,146.507 95.225,146.507 95.453,146.736 99.784,146.736 99.797,146.736 Ch2.27@99.797,146.507 ; Ch2.27 99.797,146.5 Ch2.27@99.797,146.507 ; Ch3.27 Ch3.27@119.784,146.507 ; Ch5.27 181.635,146.5 Ch5.27@181.635,146.507 ; Ch6.27 Ch6.27@201.628,146.507 ; Ch7.27 221.615,146.5 Ch7.27@221.615,146.507 ; Ch8.27 241.63,146.5 241.63,146.507 241.628,146.507 221.628,146.507 Ch7.27@221.615,146.507 ; Ch2.27@99.797,146.507 Ch3.27@119.784,146.507 ; Ch3.27@119.784,146.507 139.784,146.507 Ch4.27 142.392,146.5 142.392,146.507 177.089,146.507 177.317,146.736 181.628,146.736 181.635,146.736 Ch5.27@181.635,146.507 ; Ch5.27@181.635,146.507 Ch6.27@201.628,146.507 ; Ch6.27@201.628,146.507 Ch7.27@221.615,146.507
NetCh1_28: "Parllel Port.26" Ch1.28 Ch2.28 Ch3.28 Ch4.28 Ch5.28 Ch6.28 Ch7.28 Ch8.28 U1.2 | length 250
  Top Layer w1: 41.148,138.684 41.91,138.684 43.586,140.36 43.586,141.3 46.228,143.942 55.4,143.942 Ch1.28
  Bottom Layer w1: 41.148,138.684 41.148,106.68 44.45,103.378 U1.2 ; Ch1.28 58.166,143.96 58.166,143.967 95.225,143.967 95.453,144.196 99.784,144.196 99.797,144.196 Ch2.28@99.797,143.967 ; Ch2.28 99.797,143.96 Ch2.28@99.797,143.967 ; Ch3.28 Ch3.28@119.784,143.967 ; Ch5.28 181.635,143.96 Ch5.28@181.635,143.967 ; Ch8.28 241.63,143.96 241.63,143.967 241.628,143.967 224.13,143.967 224.13,143.96 Ch7.28 221.621,143.967 204.14,143.967 204.14,143.96 Ch6.28 201.621,143.967 Ch5.28@181.635,143.967 ; Ch2.28@99.797,143.967 Ch3.28@119.784,143.967 ; Ch3.28@119.784,143.967 139.784,143.967 Ch4.28 142.392,143.96 142.392,143.967 177.089,143.967 177.317,144.196 181.628,144.196 181.635,144.196 Ch5.28@181.635,143.967
NetCh1_29: "Parllel Port.24" Ch1.29 Ch2.29 Ch3.29 Ch4.29 Ch5.29 Ch6.29 Ch7.29 Ch8.29 U1.3 | length 281.9
  Top Layer w1: U1.3 52.349,100.838 51.587,101.6 51.587,130.454 57.709,136.576 57.709,140.335 56.617,141.427 55.4,141.427 Ch1.29
  Bottom Layer w1: 41.148,141.224 42.266,141.224 56.109,127.381 56.109,102.337 54.61,100.838 U1.3 ; Ch1.29 58.166,141.42 58.166,141.427 95.225,141.427 95.453,141.656 99.784,141.656 99.797,141.656 Ch2.29@99.797,141.427 ; Ch2.29 99.797,141.42 Ch2.29@99.797,141.427 ; Ch3.29 Ch3.29@119.784,141.427 ; Ch5.29 181.635,141.42 Ch5.29@181.635,141.427 ; Ch6.29 201.651,141.42 Ch6.29@201.651,141.427 ; Ch8.29 241.628,141.427 224.13,141.427 224.13,141.42 Ch7.29 221.621,141.427 Ch6.29@201.651,141.427 ; Ch2.29@99.797,141.427 Ch3.29@119.784,141.427 ; Ch3.29@119.784,141.427 139.784,141.427 Ch4.29 142.392,141.42 142.392,141.427 181.628,141.427 Ch5.29@181.635,141.427 ; Ch5.29@181.635,141.427 201.628,141.427 Ch6.29@201.651,141.427
NetCh1_30: "Parllel Port.20" Ch1.30 Ch2.30 Ch3.30 Ch4.30 Ch5.30 Ch6.30 Ch7.30 Ch8.30 U1.4 | length 252.8
  Top Layer w1: U1.4 50.343,98.298 49.581,99.06 49.581,135.103 53.34,138.862 55.4,138.862 Ch1.30
  Bottom Layer w1: 41.148,146.304 47.625,146.304 52.654,141.275 52.654,139.573 53.34,138.887 55.393,138.887 Ch1.30 58.166,138.88 58.166,138.887 99.784,138.887 99.789,138.887 99.79,138.886 Ch2.30@99.797,138.88 ; Ch2.30 Ch2.30@99.797,138.88 ; Ch3.30 Ch3.30@119.784,138.862 ; Ch4.30 Ch4.30@139.766,138.862 ; Ch6.30 Ch6.30@201.61,138.862 ; Ch8.30 241.628,138.887 224.13,138.887 224.13,138.88 Ch7.30 221.107,138.88 221.107,138.862 201.628,138.862 Ch6.30@201.61,138.862 ; Ch2.30@99.797,138.88 99.797,138.862 Ch3.30@119.784,138.862 ; Ch3.30@119.784,138.862 119.793,138.871 119.809,138.887 135.661,138.887 135.687,138.862 Ch4.30@139.766,138.862 ; Ch4.30@139.766,138.862 139.784,138.862 159.893,138.862 159.918,138.887 181.621,138.887 Ch5.30 184.125,138.88 184.125,138.887 199.441,138.887 199.466,138.862 Ch6.30@201.61,138.862
NetCh2_7: Ch2.7 U3.34 | length 168
  Top Layer w1: Ch2.7 99.784,197.307 101.752,197.307 112.268,186.792 v1(112.268,128.346) ; v1(122.936,117.678) 122.936,69.444 134.849,57.531 138.633,57.531 142.57,53.594 U3.34
  Bottom Layer w1: v1(112.268,128.346) v1(122.936,117.678)
NetCh2_8: Ch2.8 U3.35 | length 171.1
  Top Layer w1: Ch2.8 100.228,194.76 100.228,194.539 101.244,194.539 102.108,193.675 102.108,193.04 106.375,188.773 106.68,188.773 109.449,186.004 v1(109.449,131.343) ; v1(117.094,106.553) 119.507,104.14 119.507,68.732 123.901,64.338 123.901,60.452 133.299,51.054 U3.35
  Bottom Layer w1: v1(109.449,131.343) 109.449,114.198 v1(117.094,106.553)
NetCh2_9: Ch2.9 U3.36 | length 438.6
  Top Layer w1: v1(25.883,26.187) 19.914,32.156 19.914,67.894 19.634,68.174 19.634,113.005 19.914,113.284 19.914,205.74 22.479,208.305 33.223,208.305 42.088,217.17 64.135,217.17 67.92,213.385 67.92,199.085 v1(74.778,192.227)
  Bottom Layer w1: v1(25.883,26.187) 25.883,22.86 28.931,19.812 137.897,19.812 150.063,31.979 150.063,45.771 147.32,48.514 U3.36 ; v1(74.778,192.227) 99.39,192.227 99.39,192.22 Ch2.9
NetCh2_10: Ch2.10 U1.17 | length 166
  Top Layer w1: U1.17 54.762,65.278 56.769,67.285 56.769,111.684 61.722,116.637 61.722,189.205 v1(62.205,189.687)
  Bottom Layer w1: v1(62.205,189.687) 99.784,189.687 Ch2.10
NetCh2_10: 
NetCh3_7: Ch3.7 U3.21 | length 174.2
  Top Layer w1: Ch3.7 119.786,197.3 119.786,197.307 123.419,197.307 126.771,200.66 126.771,216.51 128.27,218.008 144.018,218.008 145.796,216.23 U3.21
NetCh3_8: Ch3.8 U3.32 | length 154.7
  Top Layer w1: Ch3.8 119.786,194.76 119.786,194.996 124.104,194.996 124.333,194.767 125.679,194.767 126.746,193.7 126.746,173.736 130.023,170.459 130.023,67.462 135.382,62.103 141.503,62.103 144.932,58.674 U3.32
NetCh3_9: Ch3.9 U3.33 | length 172.1
  Top Layer w1: v1(114.579,60.401) 114.579,113.411 124.104,122.936 124.104,189.992 121.641,192.456 119.784,192.456 Ch3.9
  Bottom Layer w1: v1(114.579,60.401) 131.648,60.401 135.915,56.134 U3.33
NetCh3_10: Ch3.10 U1.18 | length 222
  Top Layer w1: U1.18 56.998,62.738 60.427,66.167 60.427,111.227 68.936,119.736 68.936,177.521 87.122,195.707 87.122,212.623 89.357,214.859 114.3,214.859 117.348,211.811 117.348,190.449 118.11,189.687 119.784,189.687 Ch3.10
NetCh3_10: 
NetCh4_8: Ch4.8 U3.23 | length 117.8
  Top Layer w1: Ch4.8 139.784,194.64 142.088,194.64 143.535,193.192 143.535,82.55 144.551,81.534 U3.23
NetCh4_9: Ch4.9 U3.22 | length 124.9
  Top Layer w1: U3.22 147.32,84.074 148.057,84.811 148.057,115.976 152.73,120.65 v1(152.73,192.202)
  Bottom Layer w1: Ch4.9 142.316,192.22 142.316,192.202 v1(152.73,192.202)
NetCh4_10: Ch4.10 U1.19 | length 309.4
  Top Layer w1: v1(129.591,215.29) 129.591,193.04 132.969,189.662 139.784,189.662 Ch4.10
  Bottom Layer w1: U1.19 44.882,60.198 43.053,62.027 37.363,62.027 31.445,67.945 31.445,91.973 32.715,93.243 32.715,97.307 33.223,97.815 33.223,105.791 27.813,111.201 27.813,211.633 31.471,215.29 v1(129.591,215.29)
NetCh4_10: 
NetCh5_7: Ch5.7 U3.27 | length 146.9
  Top Layer w1: v1(164.871,102.768) 164.871,111.277 171.755,118.161 171.755,121.971 177.622,127.838 177.622,131.293 180.34,134.01 180.797,134.01 183.947,137.16 183.947,196.215 182.982,197.18 181.628,197.18 Ch5.7
  Bottom Layer w1: U3.27 147.32,71.374 151.994,76.048 151.994,93.701 153.187,94.894 156.997,94.894 v1(164.871,102.768)
NetCh5_8: Ch5.8 U3.26 | length 196.2
  Top Layer w1: v1(169.316,108.763) 169.316,110.871 185.953,127.508 185.953,213.36 184.455,214.859 179.756,214.859 179.324,214.427 179.324,195.58 180.086,194.818 181.628,194.818 181.635,194.818 181.635,194.76 Ch5.8
  Bottom Layer w1: U3.26 143.51,73.914 141.529,75.895 141.529,91.77 158.521,108.763 v1(169.316,108.763)
NetCh5_9: Ch5.9 U3.25 | length 137
  Top Layer w1: v1(158.75,104.47) 158.75,105.791 162.865,109.906 162.865,113.284 169.647,120.066 169.647,123.977 172.085,126.416 172.085,188.646 v1(174.473,191.033)
  Bottom Layer w1: U3.25 144.043,76.454 143.535,76.962 143.535,89.256 v1(158.75,104.47) ; v1(174.473,191.033) 175.666,192.227 179.248,192.227 179.248,192.22 Ch5.9
NetCh5_10: Ch5.10 U1.20 | length 360.3
  Top Layer w1: v1(176.251,211.684) 176.251,193.04 179.603,189.687 181.628,189.687 181.635,189.687 181.635,189.68 Ch5.10
  Bottom Layer w1: U1.20 37.821,57.658 29.439,66.04 29.439,94.742 30.251,95.555 30.251,105.41 28.321,107.34 27.661,107.34 25.806,109.195 25.806,215.392 29.591,219.177 168.758,219.177 v1(176.251,211.684)
NetCh5_10: 
NetCh6_7: Ch6.7 U3.11 | length 348.9
  Top Layer w1: Ch6.7 201.628,197.307 208.28,197.307 211.633,200.66 211.633,201.651 216.154,206.172 v1(216.154,220.142)
  Bottom Layer w1: U3.11 168.681,63.754 171.475,60.96 171.475,54.864 175.26,51.079 216.916,51.079 219.608,48.387 254,48.387 257.251,51.638 257.251,218.516 255.626,220.142 v1(216.154,220.142)
NetCh6_9: Ch6.9 U3.28 | length 202
  Top Layer w1: v1(139.217,126.771) 139.217,72.593 142.977,68.834 U3.28 ; Ch6.9 202.819,192.22 202.819,192.227 205.74,192.227 208.915,189.052 v1(208.915,133.198)
  Bottom Layer w1: v1(139.217,126.771) 207.416,126.771 208.915,128.27 v1(208.915,133.198)
NetCh6_10: Ch6.10 U1.21 | length 341.9
  Top Layer w1: U1.21 69.926,57.658 69.926,57.353 80.366,46.914 80.366,38.1 83.363,35.103 148.565,35.103 153.695,40.234 153.695,111.15 166.243,123.698 166.243,215.113 167.996,216.865 195.682,216.865 199.187,213.36 199.187,191.186 200.66,189.713 201.628,189.713 Ch6.10
NetCh6_10: 
NetCh7_7: Ch7.7 U3.14 | length 172.2
  Top Layer w1: U3.14 158.318,71.374 156.769,72.923 156.769,90.221 171.831,105.283 171.831,109.118 190.881,128.168 210.82,128.168 214.147,131.496 v1(214.147,197.307)
  Bottom Layer w1: v1(214.147,197.307) 221.628,197.307 Ch7.7
NetCh7_8: Ch7.8 U3.13 | length 253.6
  Top Layer w1: v1(237.896,198.653) 237.896,213.36 239.395,214.859 243.992,214.859 245.491,213.36 245.491,207.518 246.329,206.68 246.329,195.936 249.936,192.329 v1(249.936,114.656)
  Bottom Layer w1: U3.13 172.72,68.834 176.86,72.974 176.86,79.426 178.613,81.178 201.498,81.178 233.096,112.776 237.566,112.776 239.446,114.656 v1(249.936,114.656) ; Ch7.8 221.628,194.767 232.639,194.767 236.525,198.653 v1(237.896,198.653)
NetCh7_9: Ch7.9 U3.12 | length 393.5
  Top Layer w1: v1(188.595,65.024) 192.049,61.57 192.049,40.157 197.028,35.179 255.194,35.179 258.115,38.1 258.115,218.542 254,222.656 213.639,222.656 208.89,217.907 v1(208.89,202.413)
  Bottom Layer w1: U3.12 183.337,66.294 184.607,65.024 v1(188.595,65.024) ; v1(208.89,202.413) 208.89,195.58 212.242,192.227 221.628,192.227 221.64,192.227 221.64,192.22 Ch7.9
NetCh7_10: Ch7.10 U1.24 | length 280.4
  Top Layer w1: v1(179.451,111.785) 179.451,113.055 179.527,113.132 183.54,113.132 189.713,119.304 189.713,123.317 192.151,125.755 230.48,125.755 236.169,131.445 v1(236.169,189.687)
  Bottom Layer w1: U1.24 125.832,65.278 129.134,68.58 129.134,85.75 155.169,111.785 v1(179.451,111.785) ; Ch7.10 221.628,189.687 v1(236.169,189.687)
NetCh7_10: 
NetCh8_7: Ch8.7 U3.17 | length 200.7
  Bottom Layer w1: U3.17 159.791,78.994 158.775,80.01 158.775,88.544 159.106,88.875 168.554,88.875 169.139,89.459 170.739,89.459 193.319,112.039 227.178,112.039 229.921,114.783 234.467,114.783 237.007,117.323 250.038,117.323 250.038,193.65 246.38,197.307 241.63,197.307 241.63,197.3 Ch8.7
NetCh8_8: Ch8.8 U3.16 | length 195
  Bottom Layer w1: U3.16 157.48,76.454 156.769,77.165 156.769,91.694 157.48,92.405 167.132,92.405 191.567,116.84 232.435,116.84 236.677,121.082 241.833,121.082 245.948,125.197 245.948,193.04 244.221,194.767 241.628,194.767 Ch8.8
NetCh8_9: Ch8.9 U3.15 | length 181
  Top Layer w1: U3.15 159.791,73.914 158.775,74.93 158.775,88.9 160.274,90.399 164.109,90.399 196.139,122.428 236.22,122.428 239.319,125.527 239.319,191.516 240.03,192.227 241.628,192.227 Ch8.9
NetCh8_9: 
NetCh8_10: Ch8.10 U1.25 | length 286.9
  Bottom Layer w1: U1.25 118.212,67.818 121.514,71.12 121.514,112.116 123.292,113.894 125.451,113.894 126.619,115.062 173.609,115.062 179.908,121.361 190.729,121.361 192.456,123.088 238.887,123.088 243.942,128.143 243.942,188.087 242.57,189.459 241.628,189.459 Ch8.10
NetCh8_10: 
NetLCD_3: LCD.3 R1.3 | length 8.6
  Bottom Layer w1: LCD.3 249.149,98.552 252.705,102.108 R1.3
NetLCD_4: LCD.4 U2.25 | length 52.9
  Bottom Layer w1: U2.25 240.538,67.081 241.3,66.319 252.095,66.319 252.959,67.183 252.959,74.651 241.554,86.055 241.554,97.536 242.57,98.552 LCD.4
NetLCD_6: LCD.6 U2.24 | length 37.7
  Bottom Layer w1: U2.24 243.078,76.632 239.547,80.162 239.547,99.339 241.3,101.092 LCD.6
NetLCD_11: LCD.11 U2.26 | length 62.4
  Top Layer w1: U2.26 237.998,67.081 238.76,66.319 252.095,66.319 252.959,67.183 252.959,93.853 251.892,94.92 251.892,105.74 248.92,108.712 LCD.11
NetLCD_12: LCD.12 U2.27 | length 44.4
  Bottom Layer w1: U2.27 235.458,100.813 243.357,108.712 LCD.12
NetLCD_14: LCD.14 U2.29 | length 49.7
  Bottom Layer w1: U2.29 230.378,99.466 242.164,111.252 LCD.14
"NetParllel Port_1": "Parllel Port.1" U1.26 | length 226.9
  Top Layer w1: v1(35.56,41.834) 35.56,46.507 31.445,50.622 31.445,102.311 31.699,102.565 31.699,165.583 35.281,169.164 38.608,169.164 ; v1(52.857,43.866) 52.68,43.688 52.68,29.896 55.88,26.695 60.757,26.695 63.017,28.956 63.017,45.898 62.916,45.999 62.916,50.114 59.258,53.772 59.258,58.801 65.786,65.329 65.786,68.834 67.31,70.358 U1.26
  Bottom Layer w1: v1(35.56,41.834) 46.025,41.834 46.177,41.681 50.673,41.681 v1(52.857,43.866)
"NetParllel Port_1": 
"NetParllel Port_2": "Parllel Port.2" U1.27 | length 271.6
  Top Layer w1: 41.148,169.164 41.148,203.606 52.4,214.859 56.998,214.859 64.719,207.137 64.719,136.601 v1(65.354,135.966)
  Bottom Layer w1: v1(65.354,135.966) 65.735,135.966 65.862,135.839 101.727,135.839 104.623,132.944 104.623,75.921 101.6,72.898 U1.27
"NetParllel Port_2": 
"NetParllel Port_5": "Parllel Port.5" U1.28 | length 201.8
  Top Layer w1: 38.608,164.084 35.865,164.084 34.341,162.56 34.341,85.801 33.452,84.912 33.452,70.028 39.726,63.754 v1(39.726,36.043)
  Bottom Layer w1: v1(39.726,36.043) 53.772,36.043 54.686,35.128 62.84,35.128 65.811,38.1 65.811,73.939 67.31,75.438 U1.28
"NetParllel Port_5": 
"NetParllel Port_22": "Parllel Port.22" U1.29 | length 79.8
  Bottom Layer w1: 41.148,143.764 42.977,143.764 64.567,122.174 64.567,80.239 66.827,77.978 U1.29
"NetParllel Port_22": 
NetR2_1: R2.1 R4.2 U4.6 | length 20.3
  Bottom Layer w1: U4.6 60.452,46.482 60.452,46.736 R2.1 62.23,46.736 62.916,46.05 62.916,43.18 59.868,40.132 57.658,40.132 56.896,39.37 R4.2
NetR2_2: R2.2 U1.22 | length 16.3
  Bottom Layer w1: R2.2 71.349,49.759 71.349,59.055 70.206,60.198 U1.22
NetR2_2: 
NetR3_1: R3.1 R5.2 U4.5 | length 12.4
  Top Layer w1: R5.2 60.706,38.1 R3.1
  Bottom Layer w1: U4.5 59.868,43.942 60.122,44.196 R3.1
NetR3_2: R3.2 U1.23 | length 24.8
  Top Layer w1: R3.2 69.875,44.196 71.399,45.72 71.399,49.251 67.31,53.34 67.31,54.762 66.116,55.956 66.116,60.96 67.894,62.738 U1.23
NetR3_2: 
NetU1_6: U1.6 U3.6 | length 177.4
  Top Layer w1: v1(61.773,57.099) 64.922,53.95 64.922,50.343 65.024,50.241 65.024,37.287 69.621,32.69 153.314,32.69 v1(154.584,33.96)
  Bottom Layer w1: U1.6 58.42,93.218 61.773,89.865 v1(61.773,57.099) ; v1(154.584,33.96) 155.499,34.874 155.499,49.657 156.896,51.054 U3.6
NetU1_7: U1.7 U3.7 | length 396.8
  Top Layer w1: v1(48.489,38.557) 50.267,40.335 50.267,53.823 49.581,54.508 49.581,89.256 51.003,90.678 U1.7
  Bottom Layer w1: v1(48.489,38.557) 34.849,38.557 26.924,46.482 26.924,96.266 27.915,97.257 27.915,101.6 25.603,103.911 24.13,103.911 22.403,102.184 22.403,20.803 25.4,17.805 147.32,17.805 152.07,22.555 152.07,50.8 154.864,53.594 U3.7
NetU1_8: U1.8 U3.8 | length 216.6
  Top Layer w1: v1(41.834,85.573) 41.707,85.446 41.707,65.583 41.732,65.557 41.732,40.742 43.815,38.659 43.815,27.94 48.184,23.571 89.332,23.571 94.59,28.829 153.873,28.829 157.099,32.055 157.099,53.34 159.893,56.134 U3.8
  Bottom Layer w1: v1(41.834,85.573) 44.399,88.138 U1.8
NetU1_14: U1.14 U2.15 | length 338.1
  Top Layer w1: v1(29.439,48.997) 29.439,22.403 33.02,18.821 182.88,18.821 186.08,22.022 186.08,66.675 187.071,67.666 191.338,67.666 198.044,60.96 233.35,60.96 237.998,56.312 U2.15
  Bottom Layer w1: v1(29.439,48.997) 38.329,48.997 43.282,53.95 53.34,53.95 56.109,56.718 56.109,71.399 54.61,72.898 U1.14
NetU1_15: U1.15 U2.14 | length 274.9
  Top Layer w1: v1(44.221,69.723) 44.221,42.316 45.974,40.564 45.974,33.122 v1(49.86,29.235) ; v1(120.066,26.314) 124.181,22.2 170.942,22.2 178.283,29.54 v1(178.283,57.15)
  Bottom Layer w1: v1(44.221,69.723) 44.856,70.358 U1.15 ; v1(49.86,29.235) 52.781,26.314 v1(120.066,26.314) ; v1(178.283,57.15) 234.188,57.15 235.458,55.88 U2.14
NetU2_18: keyboard.8 U2.18 | length 89.9
  Top Layer w1: keyboard.8 193.523,98.552 193.319,98.349 193.319,77.038 199.517,70.841 199.517,67.996 203.2,64.313 238.887,64.313 245.618,57.582 U2.18
NetU2_19: keyboard.10 U2.19 | length 101
  Top Layer w1: v1(193.853,69.494) 191.313,72.034 191.313,100.178 192.227,101.092 keyboard.10
  Bottom Layer w1: v1(193.853,69.494) 201.041,62.306 245.339,62.306 248.158,59.487 U2.19
NetU2_20: keyboard.12 U2.20 | length 108.2
  Top Layer w1: v1(188.798,77.978) 188.798,101.93 190.5,103.632 keyboard.12
  Bottom Layer w1: v1(188.798,77.978) 189.916,77.978 199.339,68.555 199.339,68.174 203.2,64.313 247.345,64.313 250.698,60.96 U2.20
NetU2_21: keyboard.14 U2.21 | length 93.5
  Top Layer w1: keyboard.14 194.31,106.172 193.319,107.163 193.319,112.776 193.523,112.979 222.275,112.979 250.698,84.557 U2.21
NetU2_33: keyboard.16 U2.33 | length 67.8
  Top Layer w1: keyboard.16 195.58,110.338 196.215,110.973 218.262,110.973 220.218,109.017 U2.33
NetU2_34: keyboard.15 U2.34 | length 53.4
  Top Layer w1: keyboard.15 206.908,108.712 217.678,97.942 U2.34
NetU2_35: keyboard.13 U2.35 | length 49.4
  Top Layer w1: keyboard.13 206.197,106.172 215.138,97.231 U2.35
NetU2_36: keyboard.11 U2.36 | length 45.6
  Top Layer w1: keyboard.11 205.892,103.632 212.598,96.926 U2.36
NetU2_37: keyboard.7 U2.37 | length 39.7
  Top Layer w1: keyboard.7 206.248,98.552 209.423,95.377 209.423,75.209 210.058,74.574 U2.37
NetU2_38: keyboard.5 U2.38 | length 34
  Top Layer w1: keyboard.5 202.743,96.012 207.188,91.567 207.188,70.282 207.518,69.952 U2.38
NetU2_39: keyboard.3 U2.39 | length 29.2
  Top Layer w1: keyboard.3 200.66,93.472 204.978,89.154 U2.39
NetU2_40: keyboard.1 U2.40 | length 24.1
  Top Layer w1: keyboard.1 198.12,86.843 202.438,82.525 U2.40
pads on no net: "Parllel Port.7" "Parllel Port.25" Ch1.1 Ch1.2 Ch1.5 Ch1.6 Ch1.12 Ch1.18 Ch2.1 Ch2.2 Ch2.5 Ch2.6 Ch2.12 Ch2.18 Ch3.1 Ch3.2 Ch3.5 Ch3.6 Ch3.12 Ch3.18 Ch4.1 Ch4.2 Ch4.5 Ch4.6 Ch4.7 Ch4.12 Ch4.18 Ch5.1 Ch5.2 Ch5.5 Ch5.6 Ch5.12 Ch5.18 Ch6.1 Ch6.2 Ch6.5 Ch6.6 Ch6.8 Ch6.12 Ch6.18 Ch7.1 Ch7.2 Ch7.5 Ch7.6 Ch7.12 Ch7.18 Ch8.1 Ch8.2 Ch8.5 Ch8.6 Ch8.12 Ch8.18 keyboard.2 keyboard.4 keyboard.9 LCD.7 LCD.8 LCD.9 LCD.10 LCD.13 U1.9 U1.30 U1.31 U1.32 U2.1 U2.2 U2.3 U2.4 U2.5 U2.6 U2.7 U2.8 U2.9 U2.16 U2.17 U2.22 U2.23 U2.28 U2.30 U2.31 U2.32 U3.1 U3.2 U3.3 U3.4 U3.9 U3.10 U3.24 U3.29 U3.30 U3.31

## Text inside footprints (layer, text, board x,y; h text height)
keyboard: Top Overlay "16" at 196.088,110.236 h1.27 r90; Top Overlay "15" at 198.628,110.236 h1.27 r90; Top Overlay "1" at 198.628,88.392 h1.27 r90; Top Overlay "2" at 196.088,88.392 h1.27 r90
LCD: Top Overlay "13" at 247.396,113.284 h1.27 r90; Top Overlay "14" at 244.856,113.284 h1.27 r90; Top Overlay "1" at 247.396,92.964 h1.27 r90; Top Overlay "2" at 244.856,92.964 h1.27 r90
"Parllel Port": Top Overlay "2" at 40.64,171.704 h1.27 r270; Top Overlay "1" at 38.1,171.704 h1.27 r270; Top Overlay "25" at 38.1,137.16 h1.27 r270; Top Overlay "26" at 40.64,137.16 h1.27 r270